# EAGLE board NB-IoT Bee.v1.0 (EAGLE 7.5.0)
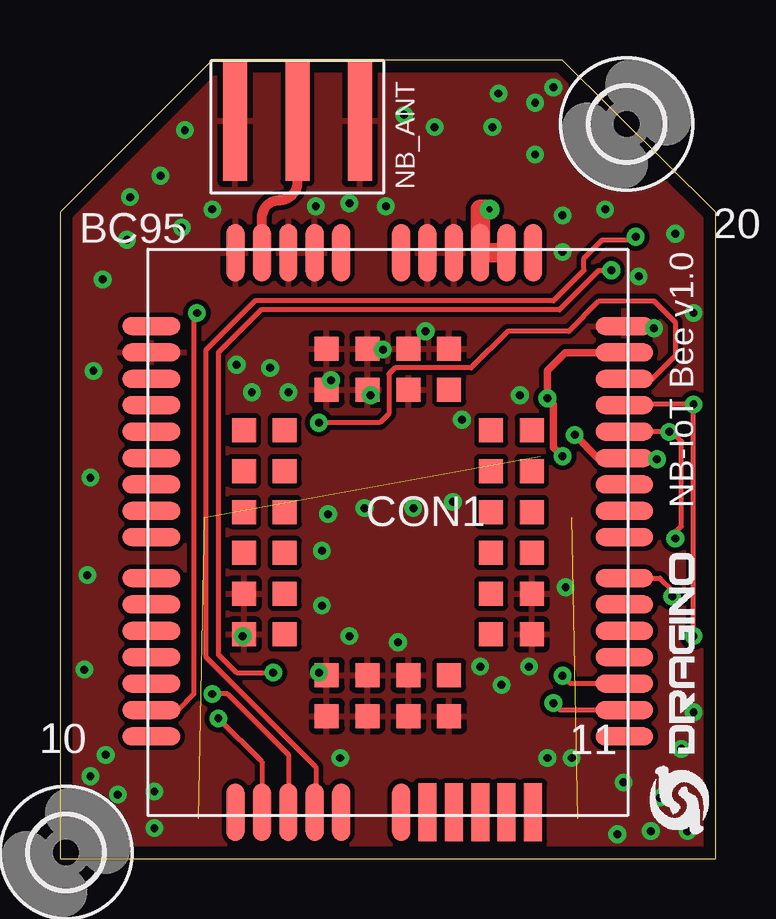
[diagram p0: board, top side]
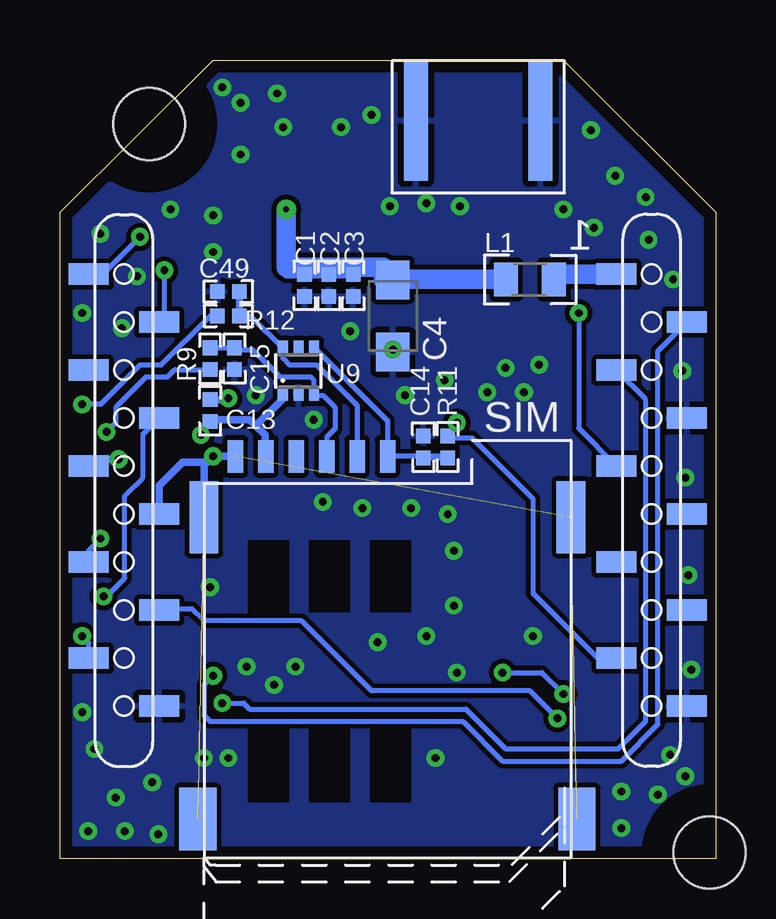
[diagram p1: board, bottom side, seen from below]

Size 27.34 x 33.27 mm. Coordinates in mm from the lower left corner, seen from the top.
Outline: 0,0 27.34,0 27.34,26.92 20.96,33.27 6.35,33.27 0,26.92 0,0
Copper layers (1+16): Top 0.035mm / dielectric 1.5mm / Bottom 0.035mm
Design rules "default *": minimum track width 8mil, minimum drill 10mil, track to track 6mil, track to pad 6mil, pad to pad 6mil, via to via 6mil, smd to smd 5mil, copper to edge 20mil, drill to drill 8mil, minimum pad ring 10mil, minimum via ring 8mil, stop-mask expansion 4mil, vias tented up to drill 25mil, thermal gap 10mil
Net classes: 0 default: width 0.203 mm, clearance 0.152 mm; 1 power: width 0.61 mm, drill 0.406 mm, clearance 0.254 mm; 2 gnd: width 0.305 mm, drill 0.254 mm, clearance 0.203 mm; 3 usbvcc: width 0.254 mm, drill 0.61 mm, clearance 0.254 mm; 4 aref: width 0.406 mm, drill 0.61 mm, clearance 0.254 mm; 5 usbtrace: width 0.254 mm, clearance 0.152 mm; 6 usbtrace-4layer: width 0.191 mm, clearance 0.203 mm

## Footprints (pad centres in the part's own frame; a part is rotated, then mirrored left to right if it is on the bottom)
BC90 = smd 2.4 x 0.75: 1 -9.86,8.6; 2 -9.86,7.5; 3 -9.86,6.4; 4 -9.86,5.3; 5 -9.86,4.2; 6 -9.86,3.1; 7 -9.86,2; 8 -9.86,0.9; 9 -9.86,-0.2; 10 -9.86,-1.9; 11 -9.86,-3; 12 -9.86,-4.1; 13 -9.86,-5.2; 14 -9.86,-6.3; 15 -9.86,-7.4; 16 -9.86,-8.5; 28 9.86,-8.5; 29 9.86,-7.4; 30 9.86,-6.3; 31 9.86,-5.2; 32 9.86,-4.1; 33 9.86,-3; 34 9.86,-1.9; 35 9.86,-0.2; 36 9.86,0.9; 37 9.86,2; 38 9.86,3.1; 39 9.86,4.2; 40 9.86,5.3; 41 9.86,6.4; 42 9.86,7.5; 43 9.86,8.6 | smd 0.75 x 2.4: 17 -6.35,-11.66; 18 -5.25,-11.66; 19 -4.15,-11.66; 20 -3.05,-11.66; 21 -1.95,-11.66; 22 0.55,-11.66; 23 1.65,-11.66; 24 2.75,-11.66; 25 3.85,-11.66; 26 4.95,-11.66; 27 6.05,-11.66; 44 6.05,11.66; 45 4.95,11.66; 46 3.85,11.66; 47 2.75,11.66; 48 1.65,11.66; 49 0.55,11.66; 50 -1.95,11.66; 51 -3.05,11.66; 52 -4.15,11.66; 53 -5.25,11.66; 54 -6.35,11.66 | smd 1 x 1: 55 -6,4.25; 56 -6,2.55; 57 -6,0.85; 58 -6,-0.85; 59 -6,-2.55; 60 -6,-4.25; 61 -2.55,-7.65; 62 -0.85,-7.65; 63 0.85,-7.65; 64 2.55,-7.65; 65 6,-4.25; 66 6,-2.55; 67 6,-0.85; 68 6,0.85; 69 6,2.55; 70 6,4.25; 71 2.55,7.65; 72 0.85,7.65; 73 -0.85,7.65; 74 -2.55,7.65; 75 -4.3,4.25; 76 -4.3,2.55; 77 -4.3,0.85; 78 -4.3,-0.85; 79 -4.3,-2.55; 80 -4.3,-4.25; 81 -2.55,-5.95; 82 -0.85,-5.95; 83 0.85,-5.95; 84 2.55,-5.95; 85 4.3,-4.25; 86 4.3,-2.55; 87 4.3,-0.85; 88 4.3,0.85; 89 4.3,2.55; 90 4.3,4.25; 91 2.55,5.95; 92 0.85,5.95; 93 -0.85,5.95; 94 -2.55,5.95
C0402 = smd 0.61 x 0.61: 1 -0.457,0; 2 0.457,0
SMC_A = smd 1.6 x 1.4: + -1.5,0; - 1.5,0
BEE-SOCKET = smd 1.67 x 0.89 bottom: 1 -9.535,9; 2 -12.465,7; 3 -9.535,5; 4 -12.465,3; 5 -9.535,1; 6 -12.465,-1; 7 -9.535,-3; 8 -12.465,-5; 9 -9.535,-7; 10 -12.465,-9; 11 9.535,-9; 12 12.465,-7; 13 9.535,-5; 14 12.465,-3; 15 9.535,-1; 16 12.465,1; 17 9.535,3; 18 12.465,5; 19 9.535,7; 20 12.465,9
C0805 = smd 1 x 1.4: 1 -1,0; 2 1,0
SMA-KE = smd 1 x 5: P$1 -2.6,0; P$2 2.6,0; P$5 0,0 | smd 1 x 5 bottom: P$3 -2.6,0; P$4 2.6,0
R0402 = smd 0.61 x 0.61: 1 -0.457,0; 2 0.457,0
SIM-MICRO-PUSH = smd 0.65 x 1.35: CLK 7.91,15.105; GND 1.56,15.105; IO 6.64,15.105; RST 5.37,15.105; VCC 2.83,15.105; VPP 4.1,15.105 | smd 1.55 x 2.6: P$1 0,0; P$2 15.8,0 | smd 1.2 x 3: P$3 15.55,12.58; P$4 0.25,12.58
SOT363 = smd 0.42 x 0.6: 1 -0.65,-0.95; 2 0,-0.95; 3 0.65,-0.95; 4 0.65,0.95; 5 0,0.95; 6 -0.65,0.95
3,0 = hole 3: 0,0

## Placement (x,y rotation side)
BC95  BC90  [BC90]  13.67,13.59 0 top
C1  22pF  [C0402]  17.14,23.88 270 bottom
C2  100pF  [C0402]  16.13,23.88 270 bottom
C3  0.1uF  [C0402]  15.11,23.88 270 bottom
C4  100uF, 6.3v,钽电容  [SMC_A]  13.46,22.61 270 bottom
C13  0.1u  [C0402]  21.08,18.67 90 bottom
C14  33pF  [C0402]  12.19,17.15 90 bottom
C15  33pF  [C0402]  20.07,20.83 270 bottom
C49  33pF  [C0402]  20.32,23.62 180 bottom
CON1  BEE-SOCKET  [BEE-SOCKET]  13.67,15.35 0 top
L1  PZ2012D301-1R5TF  [C0805]  7.75,24.13 0 bottom
NB_ANT  NL  [SMA-KE]  9.91,30.73 180 top
R9  22R  [R0402]  21.08,20.83 270 bottom
R11  22R  [R0402]  11.18,17.15 90 bottom
R12  22R  [R0402]  20.32,22.61 180 bottom
SIM  SIM_CARD_CON_6MICRO  [SIM-MICRO-PUSH]  21.59,1.65 0 bottom
U9  SMF05C  [SOT363]  17.4,20.32 0 bottom
U$1  LOGO-NEW  [LOGO-SILK-NEW]  27.05,1.02 90 top
U$2  [3,0]  23.62,30.61 0 top
U$3  [3,0]  0.25,0.25 0 top

## Library data of the parts
BC95 C1-C4 C13-C15 C49 L1 R9 R11 R12 U9 U$1 = dragino
CON1 SIM = dragino-passive
NB_ANT = sma-ke
U$2 U$3 = holes

## Nets
!RESET: BC95.15 CON1.5
DBG_RXD: BC95.19 CON1.19
DBG_TXD: BC95.20 CON1.20
GND [gnd]: BC95.2 BC95.43 BC95.47 BC95.48 BC95.51 BC95.52 BC95.54 BC95.59 BC95.60 BC95.61 BC95.62 BC95.63 BC95.64 BC95.65 BC95.66 BC95.71 BC95.72 BC95.73 BC95.74 BC95.81 BC95.82 BC95.83 BC95.92 BC95.93 BC95.94 C1.2 C2.2 C3.2 C4.- C14.2 C15.2 C49.2 CON1.4 CON1.10 CON1.11 NB_ANT.P$1 NB_ANT.P$2 NB_ANT.P$3 NB_ANT.P$4 U9.2
MAIN_RXD: BC95.29 CON1.3
MAIN_TXD: BC95.30 CON1.2
NETLIGHT: BC95.18 CON1.13
RF_ANT: BC95.53 NB_ANT.P$5
RI: BC95.34 CON1.17
SIM_CLK1: C14.1 R11.1 SIM.CLK U9.4
SIM_DATA1: C49.1 R12.1 SIM.IO U9.6
SIM_RST1: C15.1 R9.1 SIM.RST U9.3
USIM_CLK: BC95.41 CON1.9 R11.2
USIM_DATA: BC95.40 CON1.12 R12.2
USIM_GND: BC95.42 C13.2 CON1.15 SIM.GND SIM.P$1 SIM.P$2 SIM.P$3 SIM.P$4
USIM_RST: BC95.39 CON1.14 R9.2
USIM_VDD: BC95.38 C13.1 CON1.16 SIM.VCC U9.1
VIN: CON1.1 L1.2
VIN1: BC95.45 BC95.46 C1.1 C2.1 C3.1 C4.+ L1.1

## Tracks (layer width: path | path; a pad name or v marks a point on that pad's centre or on a via)
!RESET  (via drill 0.33)
  Top 0.203: BC95.15 4.92,6.19 5.59,6.86 5.59,22.61 v5.71,22.73
  Bottom 0.203: v5.71,22.73 5.71,17.93 CON1.5
DBG_RXD  (via drill 0.33)
  Top 0.203: BC95.19 9.52,4.32 6.98,6.86 v6.35,6.86 | v8.89,7.75 7.37,7.75 6.6,8.51 6.6,21.08 8.38,22.86 20.83,22.86 22.48,24.51 v22.99,24.51
  Bottom 0.203: CON1.19 22.99,22.57 v22.99,24.51 | v8.89,7.75 7.24,7.75 v6.35,6.86
DBG_TXD  (via drill 0.33)
  Top 0.203: BC95.20 10.67,1.98 10.67,3.81 6.1,8.38 6.1,21.21 8.13,23.24 20.57,23.24 21.84,24.51 21.84,25.02 22.61,25.78 23.88,25.78 v24,25.91
  Bottom 0.203: CON1.20 25.98,24.51 25.4,24.51 v24,25.91
GND  (via drill 0.33)
  other vias: 4.19,28.45 5.21,30.35 15.62,30.48 18.03,30.48 14.35,30.99 10.67,27.18 12.07,27.31 13.59,27.18 19.81,29.34 18.29,31.88 19.81,31.5 20.96,26.8 20.57,32.13 22.73,27.05 25.65,26.04 26.42,22.73 24.13,24.26 20.96,25.27 19.18,19.3 16.38,14.86 14.73,14.6 11.18,14.35 7.37,20.57 8.76,20.45 9.53,19.43 8,19.43 13.46,21.21 11.3,19.94 15.24,21.97 12.95,19.3 10.92,12.83 10.92,10.54 12.07,9.27 14.1,9.02 18.41,7.24 19.56,8 21.08,11.3 24.64,1.14 25.02,2.54 26.42,6.1 25.91,4.57 26.16,1.14 23.24,1.02 23.5,3.17 21.34,4.19 20.32,4.19 11.68,4.19 7.62,9.27 3.94,1.27 3.94,2.79 2.41,2.67 1.91,4.32 1.27,3.43 1.02,7.87 1.14,11.81 1.27,15.87 1.4,20.32 1.78,24.13 2.79,25.78 2.92,27.56 5.08,26.29 6.35,27.05 12.7,14.6 17.53,8 24.77,22.1 16.76,18.29 10.79,7.75
  pour Top (rank 2): -4.7,33.27 35.94,33.27 35.94,-3.56 -4.7,-3.56
  pour Bottom (rank 2): -4.7,33.02 35.94,33.02 35.94,-3.81 -4.7,-3.81
MAIN_RXD  (via drill 0.33)
  Top 0.203: BC95.29 20.86,6.19 v20.57,6.48
  Bottom 0.203: v20.57,6.48 19.69,6.48 19.43,6.22 10.41,6.22 8.76,4.57 4.06,4.57 2.92,5.71 2.92,19.14 CON1.3 3.98,20.19 3.68,20.19
MAIN_TXD  (via drill 0.33)
  Top 0.203: BC95.30 21.29,7.29 v20.96,7.62
  Bottom 0.203: v20.96,7.62 21.34,7.24 21.34,5.97 21.08,5.71 10.54,5.71 8.89,4.06 3.94,4.06 2.41,5.59 2.41,21.15 CON1.2
NETLIGHT  (via drill 0.33)
  Top 0.203: BC95.18 8.42,4.02 v6.6,5.84
  Bottom 0.203: CON1.13 23.14,10.41 21.84,10.41 21.34,9.91 17.27,9.91 14.35,6.98 7.75,6.98 v6.6,5.84
RF_ANT
  Top 0.406: BC95.53 8.42,26.71 arc-90 9.14,27.43 arc90 9.91,28.19 NB_ANT.P$5
RI  (via drill 0.33)
  Top 0.203: BC95.34 25.01,11.69 25.53,11.18 v25.53,10.92
  Bottom 0.203: v25.53,10.92 25.4,10.92 24.64,11.68 24.64,15.11 23.88,15.87 23.88,17.68 CON1.17
SIM_CLK1
  Bottom 0.203: U9.4 16.7,21.27 13.68,18.25 SIM.CLK 11.24,16.76 R11.1 C14.1
SIM_DATA1
  Bottom 0.203: R12.1 19.39,22.61 U9.6 18.05,20.84 17.78,20.57 16.64,20.57 14.95,18.89 SIM.IO 14.99,16.79
  Bottom 0.305: C49.1 R12.1
SIM_RST1
  Bottom 0.203: R9.1 C15.1 19.99,21.21 19.3,21.21 18.16,20.07 16.89,20.07 16.76,19.94 16.76,19.39 U9.3 16.68,19.3 16.38,19.3 15.88,18.8 15.88,17.91 16.22,17.56 SIM.RST
USIM_CLK  (via drill 0.33)
  Top 0.203: BC95.41 23.04,19.99 22.99,19.94 24.64,19.94 25.65,20.96 25.65,22.35 24.77,23.24 22.48,23.24 21.21,21.97 18.67,21.97 17.14,20.45 13.97,20.45 13.72,20.19 13.72,18.54 13.34,18.16 v10.79,18.16
  Bottom 0.203: v10.79,18.16 10.79,17.98 R11.2 11.1,17.53 10.16,17.53 7.62,14.99 7.62,11.05 4.92,8.35 CON1.9
USIM_DATA  (via drill 0.33)
  Top 0.203: BC95.40 23.57,18.92 v26.42,18.92 v26.42,9.27
  Bottom 0.203: v26.42,18.92 25.65,18.92 24,20.57 23.11,20.57 21.08,22.61 R12.2 | CON1.12 26.14,8.99 v26.42,9.27
USIM_GND  (via drill 0.33)  (3 unrouted)
  Top 0.305: BC95.42 23.52,21.08 21.08,21.08 20.32,20.32 v20.32,19.18 20.57,18.92 20.57,17.15 v20.96,16.76
  Bottom 0.305: v20.32,19.18 20.37,19.13 C13.2 | CON1.15 23.21,15.53 22.23,16.51 21.21,16.51 v20.96,16.76 | SIM.GND v20.95,16.76 v20.96,16.76 | SIM.P$4 21.34,16.38 v20.96,16.76
USIM_RST  (via drill 0.33)
  Top 0.203: v25.65,13.33 25.65,13.59 25.91,13.84 25.91,17.4 25.53,17.78 v25.4,17.78 23.54,17.78 BC95.39
  Bottom 0.203: CON1.14 26.14,12.85 v25.65,13.33 | v25.4,17.78 25.02,18.16 25.02,18.8 23.75,20.07 22.86,20.07 22.55,20.37 R9.2
USIM_VDD  (via drill 0.33)
  Top 0.305: v24.89,16.64 23.58,16.64 BC95.38 22.43,16.69 v21.46,17.65
  Bottom 0.305: v24.89,16.64 25.85,16.64 CON1.16 | U9.1 18.05,19.16 19.18,18.03 | 19.18,18.03 19.43,18.29 20.96,18.29 21.08,18.16 C13.1 21.46,17.83 v21.46,17.65 | 19.18,18.03 18.8,17.65 18.8,16.79 SIM.VCC
VIN
  Bottom 0.813: CON1.1 6.75,24.35 L1.2
VIN1  (via drill 0.25 pad 0.81)
  Top 0.813: v17.91,27.05 17.52,27.05 17.52,25.78 BC95.46 BC95.45
  Bottom 0.305: C3.1 C2.1 16.76,24.33 16.76,24.64 | C1.1 17.91,24.33 17.91,24.89
  Bottom 0.813: L1.1 13.46,24.13 C4.+ 13.84,24.11 13.84,24.64 16.76,24.64 17.91,24.64 17.91,24.89 v17.91,27.05

## Text on the board
tPlace: NB-IoT Bee v1.0